# EAGLE board Ctrl_AVR_Reg_Rev30 (EAGLE 5.01)
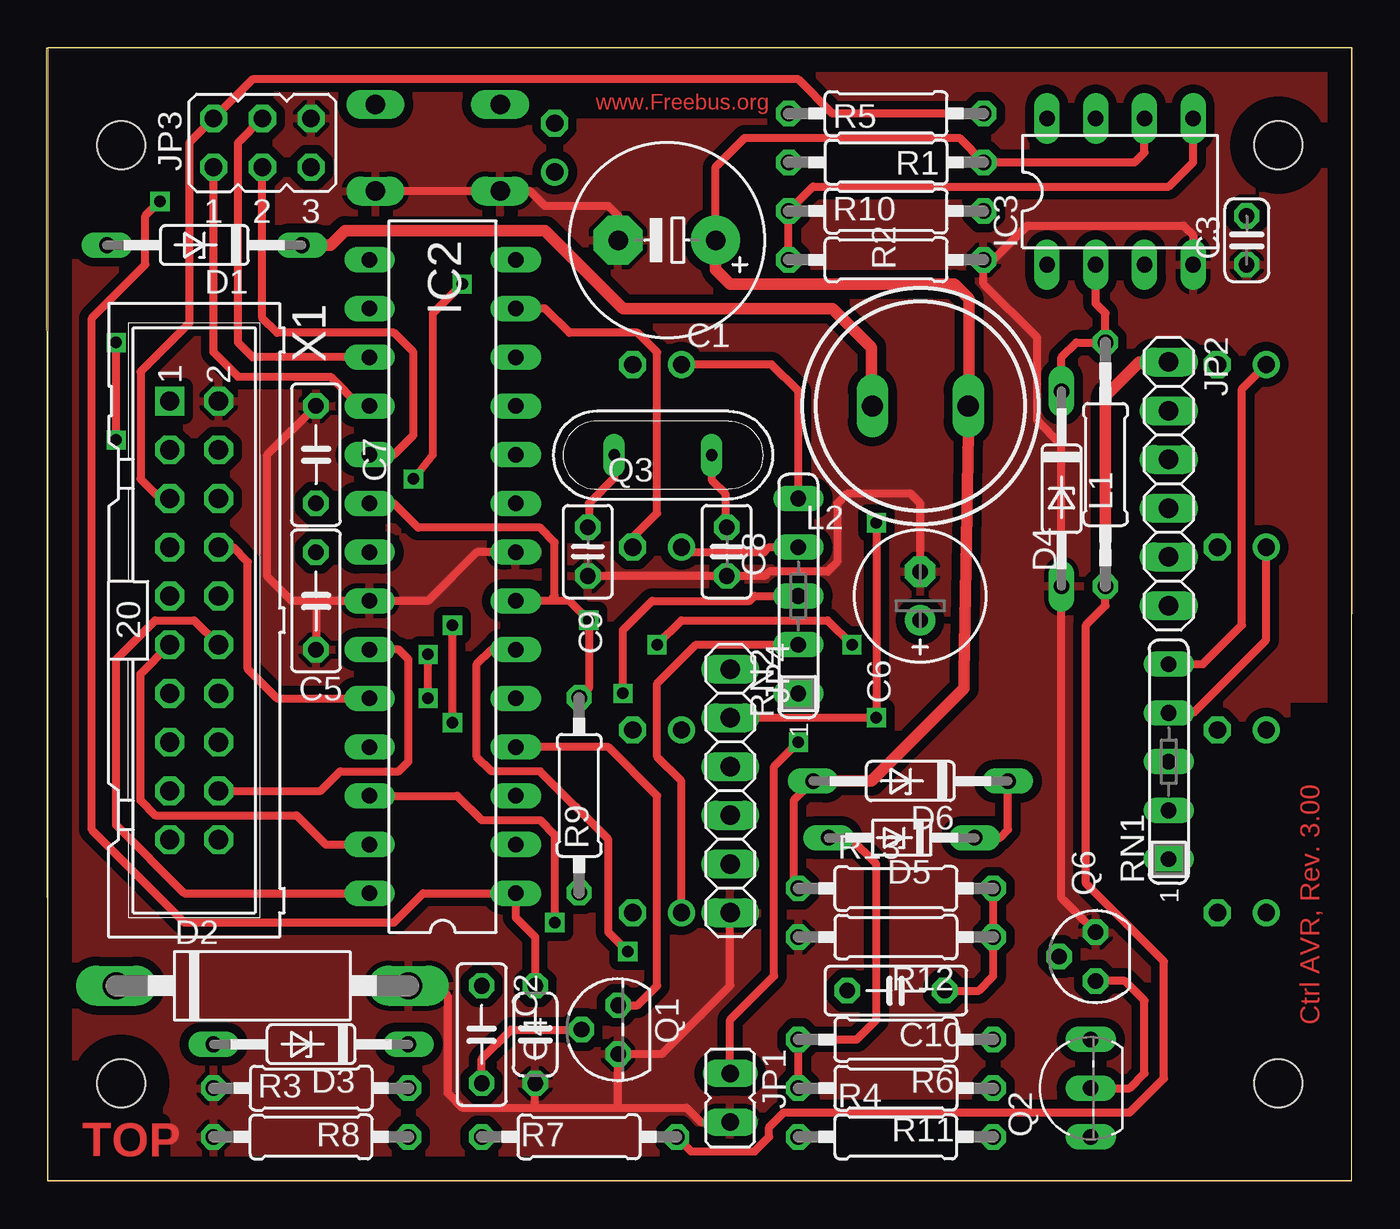
[diagram p0: board, top side]
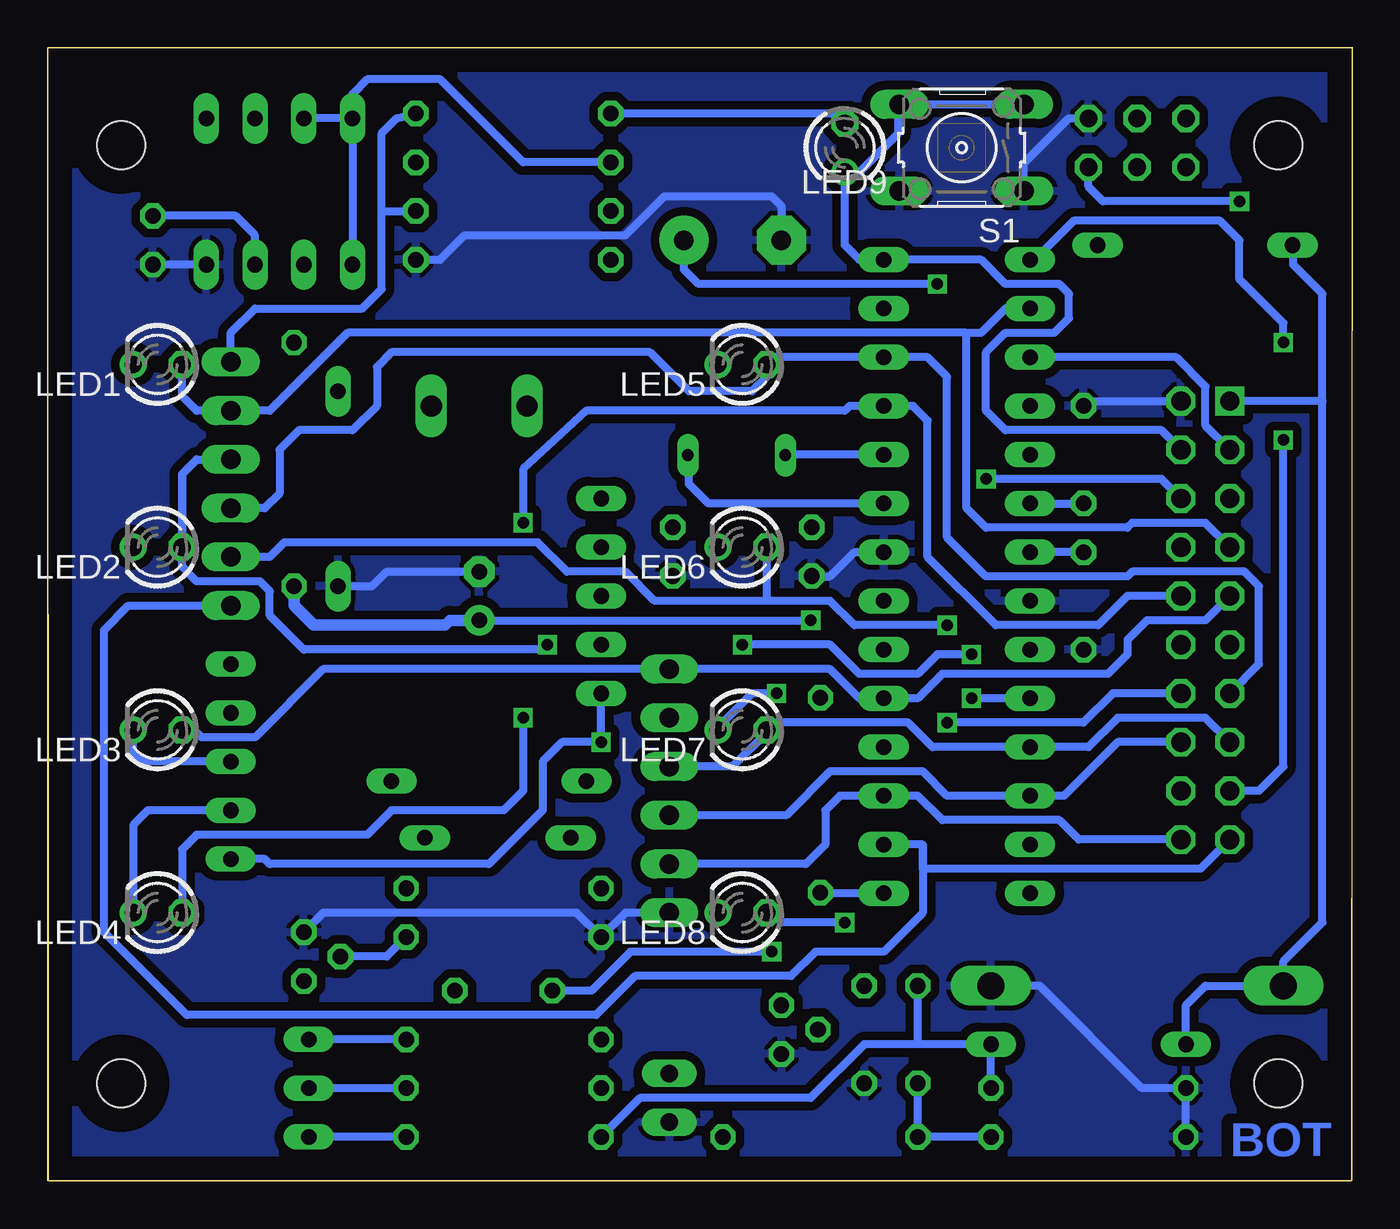
[diagram p1: board, bottom side, seen from below]

Size 67.94 x 59.04 mm. Coordinates in mm from the lower left corner, seen from the top.
Outline: 0,59.04 0,0 67.94,0 67.94,59.04 0,59.04
Copper layers (1*16): Top 0.035mm / dielectric 1.5mm / Bottom 0.035mm
Design rules "idefix-default *": minimum track width 10mil, minimum drill 24mil, track to track 18mil, track to pad 12mil, pad to pad 8mil, via to via 12mil, smd to smd 8mil, copper to edge 50mil, drill to drill 45mil, minimum pad ring 10mil, minimum via ring 8mil, stop-mask expansion 4mil, vias tented up to drill 0mil, thermal gap 10mil
Net classes: 0 default: width 0.406 mm; 1 supply: width 0.406 mm
Holes 2.5 mm at 3.81,53.97 64.13,5.08 64.13,53.97 3.81,5.08
tRestrict: area 64.8,7.4 to 66.8,24.9; area 27.4,55.4 to 37.8,56.6
Milling: 4 lines

## Footprints (pad centres in the part's own frame; a part is rotated, then mirrored left to right if it is on the bottom)
E5-10,5 = drill 1.016 pad 2.54 round: + -2.54,0 | drill 1.016 pad 2.54 octagon: - 2.54,0
C050-025X075 = drill 0.813 octagon: 1 -2.54,0; 2 2.54,0
C025-024X044 = drill 0.813 octagon: 1 -1.27,0; 2 1.27,0
C050-024X044 = drill 0.813 octagon: 1 -2.54,0; 2 2.54,0
E2,5-7 = drill 0.813 pad 1.6 round: + -1.27,0 | drill 0.813 pad 1.6 octagon: - 1.27,0
C025-025X050 = drill 0.813 octagon: 1 -1.27,0; 2 1.27,0
DO35Z10 = drill 0.813 long: A 5.08,0; C -5.08,0
C1702-15 = drill 1.397 long: A 7.62,0; C -7.62,0
DO34Z7 = drill 0.813 long: A 3.81,0; C -3.81,0
DIL28-3 = drill 0.813 long: 1 -16.51,-3.81; 2 -13.97,-3.81; 3 -11.43,-3.81; 4 -8.89,-3.81; 5 -6.35,-3.81; 6 -3.81,-3.81; 7 -1.27,-3.81; 8 1.27,-3.81; 9 3.81,-3.81; 10 6.35,-3.81; 11 8.89,-3.81; 12 11.43,-3.81; 13 13.97,-3.81; 14 16.51,-3.81; 15 16.51,3.81; 16 13.97,3.81; 17 11.43,3.81; 18 8.89,3.81; 19 6.35,3.81; 20 3.81,3.81; 21 1.27,3.81; 22 -1.27,3.81; 23 -3.81,3.81; 24 -6.35,3.81; 25 -8.89,3.81; 26 -11.43,3.81; 27 -13.97,3.81; 28 -16.51,3.81
DIL08 = drill 0.813 long: 1 -3.81,-3.81; 2 -1.27,-3.81; 3 1.27,-3.81; 4 3.81,-3.81; 5 3.81,3.81; 6 1.27,3.81; 7 -1.27,3.81; 8 -3.81,3.81
JP1 = drill 0.914 long: 1 0,-1.27; 2 0,1.27
1X06 = drill 1.016 long: 1 -6.35,0; 2 -3.81,0; 3 -1.27,0; 4 1.27,0; 5 3.81,0; 6 6.35,0
JP3Q = drill 0.914 octagon: 1 -2.54,-1.27; 2 -2.54,1.27; 3 0,-1.27; 4 0,1.27; 5 2.54,-1.27; 6 2.54,1.27
0207/12 = drill 0.813 octagon: 1 -6.35,0; 2 6.35,0
SD12_1000 = drill 1.1 long: 1 -2.5,0; 2 2.5,0
LED3MM = drill 0.9 octagon: A -1.27,0 | drill 0.9 round: K 1.27,0
TO92 = drill 0.813 octagon: 1 1.27,0; 2 0,1.905; 3 -1.27,0
TO92-BCE = drill 0.813 long: B 2.54,0; C 0,0; E -2.54,0
QS = drill 0.61 long: 1 -2.54,0; 2 2.54,0
SOT54E = drill 0.813 octagon: D -1.27,0; G 0,1.905; S 1.27,0
0207/10 = drill 0.813 octagon: 1 -5.08,0; 2 5.08,0
SIL5 = drill 0.813 long: 1 -5.08,0; 2 -2.54,0; 3 0,0; 4 2.54,0; 5 5.08,0
B3F-10XX = drill 1.016 long: 1 -3.251,2.261; 2 3.251,2.261; 3 -3.251,-2.261; 4 3.251,-2.261
ML20 = drill 1 square: 1 -11.43,-1.27 | drill 1 octagon: 2 -11.43,1.27; 3 -8.89,-1.27; 4 -8.89,1.27; 5 -6.35,-1.27; 6 -6.35,1.27; 7 -3.81,-1.27; 8 -3.81,1.27; 9 -1.27,-1.27; 10 -1.27,1.27; 11 1.27,-1.27; 12 1.27,1.27; 13 3.81,-1.27; 14 3.81,1.27; 15 6.35,-1.27; 16 6.35,1.27; 17 8.89,-1.27; 18 8.89,1.27; 19 11.43,-1.27; 20 11.43,1.27

## Placement (x,y rotation side)
C1  100u, 63V  [E5-10,5]  32.26,49.02 180 top
C2  100n  [C050-025X075]  22.6,7.62 270 top
C3  470p  [C025-024X044]  62.48,49.02 270 top
C4  100n  [C050-024X044]  25.4,7.62 90 top
C5  100n  [C050-025X075]  13.97,30.22 270 top
C6  100u, 16V  [E2,5-7]  45.46,30.48 90 top
C7  100n  [C050-025X075]  13.97,37.84 270 top
C8  33p  [C025-025X050]  35.38,32.79 90 top
C9  33p  [C025-025X050]  28.14,32.79 90 top
C10  100n  [C050-025X075]  44.19,9.9 180 top
D1  BAT46  [DO35Z10]  8.15,48.77 180 top
D2  P6KE39CA  [C1702-15]  11.17,10.16 0 top
D3  BAT46  [DO35Z10]  13.71,7.11 180 top
D4  BAT46  [DO35Z10]  52.83,36.06 270 top
D5  8v2  [DO34Z7]  44.5,17.88 180 top
D6  BAT46  [DO35Z10]  44.96,20.82 180 top
IC2  MEGA8-P  [DIL28-3]  20.57,31.49 90 top
IC3  MC34063AP  [DIL08]  55.88,51.56 0 top
JP1  [JP1]  35.56,4.31 180 top
JP2  [1X06]  58.42,36.32 270 top
JP3  [JP3Q]  11.17,54.1 0 top
JP4  [1X06]  35.56,20.32 270 top
L1  220u  [0207/12]  55.12,37.34 270 top
L2  150mH  [SD12_1000]  45.46,40.38 180 top
LED1  [LED3MM]  62.23,42.54 180 bottom
LED2  [LED3MM]  62.23,33.02 180 bottom
LED3  [LED3MM]  62.23,23.49 180 bottom
LED4  [LED3MM]  62.23,13.97 180 bottom
LED5  [LED3MM]  31.75,42.54 180 bottom
LED6  [LED3MM]  31.75,33.02 180 bottom
LED7  [LED3MM]  31.75,23.49 180 bottom
LED8  [LED3MM]  31.75,13.97 180 bottom
LED9  [LED3MM]  26.41,53.84 270 bottom
Q1  BC557  [TO92]  29.72,7.87 90 top
Q2  BC640  [TO92-BCE]  54.35,4.82 90 top
Q3  8,000  [QS]  32.05,37.82 0 top
Q6  BS170  [SOT54E]  54.61,11.68 90 top
R1  3R3  [0207/10]  43.69,53.08 180 top
R2  2k2  [0207/10]  43.69,48 0 top
R3  100k  [0207/10]  13.71,4.82 180 top
R4  12R  [0207/10]  44.19,2.28 0 top
R5  1k  [0207/10]  43.69,55.62 0 top
R6  100R  [0207/10]  44.19,7.36 180 top
R7  82k  [0207/10]  27.68,2.28 180 top
R8  47k  [0207/10]  13.71,2.28 0 top
R9  4k7  [0207/10]  27.68,20.09 270 top
R10  3k3  [0207/10]  43.69,50.54 0 top
R11  5k6  [0207/10]  44.19,4.82 180 top
R12  12k  [0207/10]  44.19,12.7 180 top
R13  220k  [0207/10]  44.19,15.24 0 top
RN1  1K  [SIL5]  58.42,21.84 90 top
RN2  1K  [SIL5]  39.11,30.48 90 top
S1  [B3F-10XX]  20.32,53.84 180 bottom
X1  FB_KOMPAKT  [ML20]  7.62,29.21 270 top

## Library data of the parts
C1-C10 L1 R1-R13 = rcl
D1-D6 = diode
IC2 = atmel
IC3 = mc34063
JP1 JP3 = jumper
JP2 JP4 = pinhead
L2 = inductor-neosid
LED1-LED9 = led
Q1 Q2 = transistor-pnp
Q3 = special
Q6 = transistor-small-signal
RN1 RN2 = resistor-sil
S1 = switch-omron
X1 = EIB_Freebus

## Nets
ADC4/SDA: IC2.27 X1.11
ADC5/SCL: IC2.28 X1.12
CTRL/MOSI: IC2.17 JP3.4 X1.3
EIB+: D1.A D2.C D3.A X1.1
EIB_IN: IC2.4 Q1.1
EIB_OUT: C10.2 IC2.6
GND: C1.- C3.2 C4.1 C5.2 C6.- C7.1 C8.1 C9.1 D2.A D4.A IC2.8 IC2.22 IC3.4 JP1.2 JP3.6 JP4.6 Q1.3 Q6.S R2.2 R3.2 R8.1 R12.2 S1.1 S1.2 X1.2
IO1: IC2.16 JP2.2 LED1.A X1.7
IO2: IC2.24 JP2.3 LED2.A X1.8
IO3: IC2.5 JP4.1 LED3.A X1.9
IO4: IC2.11 JP4.2 LED4.A X1.10
IO5: IC2.12 JP2.4 LED5.A X1.13
IO6: IC2.13 JP2.5 LED6.A X1.14
IO7: IC2.25 JP4.3 LED7.A X1.15
IO8: IC2.26 JP4.4 LED8.A X1.16
N$1: Q2.E R4.2
N$2: D5.C D6.C
N$3: C10.1 Q6.G R12.1 R13.2
N$4: Q2.B R6.1
N$5: Q2.C Q6.D R11.1
N$6: D1.C L2.2
N$7 [supply]: C2.2 Q1.2 R7.2 R8.2
N$8: C8.2 IC2.9 Q3.2
N$9: C9.2 IC2.10 Q3.1
N$10: D5.A R6.2 R11.2
N$11: LED4.K RN1.2
N$12: IC3.1 IC3.7 IC3.8 R1.2
N$13: LED3.K RN1.3
N$14: LED2.K RN1.4
N$15: LED1.K RN1.5
N$16: LED8.K RN2.2
N$17: LED7.K RN2.3
N$18: LED6.K RN2.4
N$19: LED9.A R5.1
N$20: D4.C IC3.2 L1.1
N$21: C3.1 IC3.3
N$22: IC3.5 R2.1 R10.1
N$23: LED5.K RN2.5
N$24: C5.1 IC2.21
N$25: JP1.1 RN1.1 RN2.1
PB4/MISO: IC2.18 JP3.1
PROG: IC2.14 LED9.K S1.3 S1.4 X1.4
RES1: IC2.15 X1.17
RES2: IC2.23 X1.18
RES3/RXD: IC2.2 JP2.6 X1.19
RES4/TXD: IC2.3 JP4.5 X1.20
RESET: C4.2 IC2.1 JP3.5 R9.2
SCK: IC2.19 JP3.3
V+: C2.1 D3.C R3.1 R4.1
VCC: C6.+ C7.2 IC2.7 IC2.20 JP2.1 JP3.2 L1.2 R5.2 R7.1 R9.1 R10.2 X1.5
VDC [supply]: C1.+ D6.A IC3.6 L2.1 R1.1 R13.1 X1.6

## Tracks (layer width: path | path; a pad name or v marks a point on that pad's centre or on a via)
ADC4/SDA
  Top 0.406: IC2.27 14.48,17.52 12.95,19.05 5.59,19.05 4.82,19.81 4.82,26.41 X1.11
ADC5/SCL
  Top 0.406: IC2.28 7.11,14.98 3.55,18.54 3.55,27.18 5.59,29.21 7.62,29.21 X1.12
CTRL/MOSI
  Top 0.406: JP3.4 9.9,54.1 9.9,43.69 10.67,42.92 IC2.17
  Bottom 0.406: X1.3 7.62,39.37 7.62,41.4 9.14,42.92 IC2.17
EIB+
  Bottom 0.406: 1.52,40.64 1.52,46.23 3.05,47.75 3.05,48.77 D1.A | 1.52,40.64 X1.1 | 1.52,40.64 1.52,13.46 3.55,11.43 D2.C 7.62,10.16 8.63,9.14 8.63,7.36 8.89,7.11 D3.A
EIB_IN
  Top 0.406: IC2.4 29.21,22.6 31.75,20.06 31.75,10.16 30.73,9.14 Q1.1
EIB_OUT  (via drill 0.6)
  Top 0.406: IC2.6 23.11,27.68 22.35,26.92 22.35,22.09 23.11,21.33 25.65,21.33 29.21,17.78 29.21,12.95 v30.22,11.94
  Bottom 0.406: v30.22,11.94 37.59,11.94 39.62,9.9 C10.2
GND
  Top 0.406: C9.1 28.17,31.52 28.19,31.49 28.22,31.52 C8.1 37.36,31.52 37.59,31.75 40.64,31.75 41.15,32.26 41.15,35.3 41.65,35.81 44.96,35.81 45.46,35.3 C6.- | 13.97,30.22 C5.2 | 13.97,30.22 IC2.22 19.81,30.22 22.35,32.76 IC2.8 | C7.1 11.43,37.84 11.43,31.49 12.7,30.22 13.97,30.22 | JP1.2 34.03,3.04 33.27,3.81 29.72,3.81 | 25.4,3.81 21.59,3.81 20.83,4.57 20.83,9.65 20.32,10.16 D2.A | 25.4,3.81 29.72,3.81 | 29.72,3.81 Q1.3 32,6.6 35.56,10.16 JP4.6 | 25.4,3.81 C4.1 | S1.1 17.25,51.58 17.27,51.56 17.3,51.58 S1.2 25.12,51.58 25.91,50.8 29.21,50.8 29.72,50.29 C1.- | IC3.4 59.43,47.75 59.69,48 59.69,49.27 59.18,49.78 51.05,49.78 49.27,48 R2.2 48.77,46.73 51.56,43.94 51.56,39.62 52.83,38.35 D4.A 52.83,14.73 Q6.S
  Bottom 0.406: IC3.4 C3.2 | R2.2 47.5,48 46.23,49.27 37.84,49.27 35.81,51.3 30.22,51.3 29.72,50.8 C1.- | IC2.8 25.91,32.76 27.18,31.49 27.94,31.49 27.96,31.52 C9.1 | C7.1 13.71,40.64 X1.2 | R8.1 R3.2 10.92,4.82 16.25,10.16 D2.A | JP4.6 37.84,13.97 R12.2 40.38,13.97 53.59,13.97 Q6.S | S1.1 17.07,53.03 14.73,55.37 JP3.6 | C6.- 50.29,31.75 51.05,30.98 D4.A
  pour Top: 0.51,58.42 0.51,0.25 67.56,0.25 67.56,58.42
  pour Bottom: 0.56,58.42 67.46,58.42 67.46,0.55 0.56,0.3
IO1
  Bottom 0.406: IC2.16 18.03,45.46 19.3,44.19 20.06,44.19 | 20.06,44.19 52.32,44.19 56.39,40.13 JP2.2 60.2,40.13 60.96,40.89 LED1.A | X1.7 7.62,34.29 11.43,34.29 11.68,34.03 19.05,34.03 20.06,35.05 20.06,44.19
IO2  (via drill 0.6)
  Top 0.406: IC2.24 11.94,25.14 10.41,26.67 10.41,32.26 9.65,33.02 X1.8 | v19.81,25.14 v19.81,27.43 | v31.75,27.94 33.02,29.21 40.64,29.21 v41.91,27.94
  Bottom 0.406: LED2.A 60.7,33.02 60.96,33.27 60.96,36.83 | JP2.3 60.2,37.59 60.96,36.83 | 60.96,36.83 60.96,32 60.2,31.24 56.89,31.24 56.39,30.73 56.39,29.46 54.61,27.68 42.16,27.68 v41.91,27.94 | IC2.24 v19.81,25.14 | v19.81,27.43 21.59,27.43 22.6,26.41 25.65,26.41 27.18,27.94 v31.75,27.94
IO3
  Bottom 0.406: X1.9 7.62,29.21 10.67,29.21 11.68,28.19 11.68,27.43 12.7,26.41 21.33,26.41 22.6,25.14 IC2.5 25.65,25.14 27.18,26.67 JP4.1 53.59,26.67 57.15,23.11 59.94,23.11 60.32,23.49 LED3.A
IO4  (via drill 0.6)
  Top 0.406: v43.18,34.29 v43.18,24.13 JP4.2
  Bottom 0.406: v43.18,34.29 43.18,37.08 39.88,40.13 26.41,40.13 26.16,40.38 IC2.11 22.86,40.38 22.1,39.62 22.1,32.51 18.54,28.95 13.21,28.95 11.68,30.48 X1.10 | LED4.A 60.96,17.27 60.2,18.03 51.31,18.03 50.04,19.3 44.19,19.3 43.18,20.32 v43.18,24.13
IO5
  Bottom 0.406: JP2.4 56.64,35.05 55.88,35.81 55.88,38.1 54.86,39.11 52.07,39.11 50.8,40.38 50.8,42.41 50.04,43.18 36.57,43.18 34.54,41.15 31.24,41.15 30.48,41.91 LED5.A 30.48,42.67 30.22,42.92 IC2.12 22.1,42.92 21.08,41.91 21.08,33.52 19.05,31.49 11.68,31.49 11.43,31.75 5.59,31.75 4.82,30.98 4.82,26.92 X1.13
IO6  (via drill 0.6)
  Top 0.406: LED6.A 30.48,33.52 31.75,34.8 31.75,43.18 30.73,44.19 27.18,44.19 25.91,45.46 IC2.13 | v21.08,23.87 v21.08,28.95
  Bottom 0.406: 30.48,30.22 36.32,30.22 37.84,31.75 40.89,31.75 42.42,33.27 55.62,33.27 56.39,32.51 JP2.5 | 30.48,30.22 LED6.A | X1.14 12.44,25.4 13.97,23.87 v21.08,23.87 | 30.48,30.22 27.18,30.22 25.91,28.95 v21.08,28.95
IO7
  Bottom 0.406: X1.15 7.62,24.13 12.19,24.13 13.71,22.6 IC2.25 21.84,22.6 23.11,23.87 29.97,23.87 30.48,23.36 | 30.48,23.36 LED7.A | 30.48,23.36 32.26,21.59 JP4.3
IO8  (via drill 0.6)
  Top 0.406: IC2.26 21.33,20.06 22.6,18.79 25.65,18.79 26.41,18.03 v26.41,13.46
  Bottom 0.406: X1.16 12.19,22.86 14.98,20.06 IC2.26 21.08,20.06 22.35,21.33 27.18,21.33 29.46,19.05 JP4.4 | LED8.A 30.22,13.97 29.72,13.46 v26.41,13.46
N$1
  Bottom 0.406: R4.2 Q2.E
N$2
  Top 0.406: D5.C 49.63,17.88 50.04,18.29 D6.C
N$3
  Top 0.406: R13.2 R12.1 49.27,10.66 48.51,9.9 C10.1
  Bottom 0.406: R12.1 50.29,11.68 Q6.G
N$4
  Bottom 0.406: R6.1 Q2.B
N$5
  Top 0.406: Q6.D 56.13,10.41 57.15,9.39 57.15,5.58 56.39,4.82 Q2.C
  Bottom 0.406: Q2.C 54.35,5.08 54.1,4.82 R11.1
N$6
  Top 0.61: D1.C 14.73,48.77 15.49,49.53 25.91,49.53 29.97,45.46 40.89,45.46 42.92,43.43 42.92,40.38 L2.2
N$7
  Top 0.406: C2.2 22.6,6.35 24.13,7.87 Q1.2
  Bottom 0.406: R8.2 R7.2 C2.2
N$8
  Top 0.406: Q3.2 34.59,36.52 35.3,35.81 35.3,34.03 35.33,34.06 C8.2
  Bottom 0.406: IC2.9 33.53,35.3 34.54,36.32 34.54,37.59 34.59,37.64 Q3.2
N$9
  Top 0.406: Q3.1 29.51,36.62 28.19,35.3 28.19,34.03 28.17,34.06 C9.2
  Bottom 0.406: Q3.1 29.49,37.82 29.46,37.84 IC2.10
N$10
  Top 0.406: R11.2 R6.2 42.16,7.36 43.18,8.38 43.18,16.51 41.81,17.88 D5.A
N$11
  Bottom 0.406: RN1.2 62.74,19.3 63.5,18.54 LED4.K
N$12
  Bottom 0.406: IC3.8 IC3.7 | IC3.8 IC3.1 | R1.2 43.18,53.08 47.5,57.4 51.31,57.4 52.07,56.64 52.07,55.88 52.32,55.62 IC3.8
N$13
  Bottom 0.406: RN1.3 62.99,21.84 63.5,22.35 LED3.K
N$14
  Top 0.406: LED2.K 63.5,28.19 59.69,24.38 RN1.4
N$15
  Top 0.406: LED1.K 62.23,41.27 62.23,28.95 60.2,26.92 RN1.5
N$16
  Top 0.406: LED8.K 33.02,20.82 31.75,22.09 31.75,25.91 33.78,27.94 RN2.2
N$17  (via drill 0.6)
  Top 0.406: RN2.3 36.83,30.48 36.57,30.22 31.49,30.22 29.97,28.7 v29.97,25.4
  Bottom 0.406: LED7.K 33.02,23.62 31.24,25.4 v29.97,25.4
N$18
  Top 0.406: RN2.4 37.59,33.02 37.34,32.76 33.27,32.76 LED6.K
N$19
  Bottom 0.406: R5.1 26.92,55.62 LED9.A
N$20
  Top 0.406: D4.C 52.83,42.92 53.59,43.69 L1.1 55.12,45.21 54.61,45.72 IC3.2
N$21
  Bottom 0.406: IC3.3 57.15,49.27 58.16,50.29 C3.1
N$22
  Top 0.406: R2.1 R10.1 39.88,51.81 58.42,51.81 59.69,53.08 IC3.5
N$23
  Top 0.406: LED5.K 37.72,42.54 39.11,41.15 RN2.5
N$24
  Bottom 0.406: 13.71,32.76 C5.1 IC2.21
N$25  (via drill 0.6)
  Top 0.406: JP1.1 35.56,8.38 37.84,10.66 37.84,21.59 v39.11,22.86
  Bottom 0.406: v39.11,22.86 RN2.1 | v39.11,22.86 38.86,22.86 | v39.11,22.86 41.15,22.86 42.16,21.84 42.16,19.3 44.96,16.51 56.39,16.51 56.64,16.76 RN1.1
PB4/MISO
  Top 0.406: IC2.18 16.25,40.38 14.73,41.91 9.9,41.91 8.63,43.18 JP3.1
PROG
  Bottom 0.406: S1.4 S1.3 | S1.4 23.6,56.11 23.62,56.13 | S1.4 23.57,55.93 23.62,55.88 23.62,54.61 25.65,52.58 LED9.K 26.41,48.77 25.65,48 IC2.14 19.3,48 18.03,46.73 15.24,46.73 14.73,46.23 14.73,44.95 15.49,44.19 18.03,44.19 19.05,43.18 19.05,40.13 18.03,39.11 9.9,39.11 X1.4
RES1  (via drill 0.6)
  Top 0.406: v3.55,38.6 v3.55,43.69
  Bottom 0.406: IC2.15 16.51,48 14.48,50.03 6.86,50.03 5.84,49.02 5.84,46.99 3.55,44.7 v3.55,43.69 | X1.17 4.82,20.32 3.55,21.59 v3.55,38.6
RES2
  Top 0.406: X1.18 14.22,20.32 15.24,21.33 18.29,21.33 18.79,21.84 18.79,27.18 18.29,27.68 IC2.23
RES3/RXD
  Bottom 0.406: X1.19 7.87,16.25 22.35,16.25 22.35,17.52 | 22.35,17.52 IC2.2 | 22.35,17.52 22.35,13.97 24.38,11.94 27.94,11.94 29.21,10.66 37.34,10.66 39.37,8.63 60.7,8.63 65.02,12.95 65.02,28.7 63.75,29.97 JP2.6
RES4/TXD
  Bottom 0.406: X1.20 14.22,17.78 15.24,18.79 21.33,18.79 22.6,20.06 IC2.3 26.67,20.06 27.43,19.3 27.43,17.52 28.45,16.51 JP4.5
RESET  (via drill 0.6)
  Top 0.406: C4.2 25.4,12.7 24.38,13.71 IC2.1 19.56,14.98 18.03,13.46 7.11,13.46 2.28,18.29 2.28,44.95 5.08,47.75 5.08,50.29 v5.84,51.05
  Bottom 0.406: R9.2 27.68,14.98 IC2.1 | v5.84,51.05 12.95,51.05 13.71,51.81 JP3.5
SCK
  Top 0.406: JP3.3 11.17,44.95 11.94,44.19 18.03,44.19 19.05,43.18 19.05,38.86 18.03,37.84 IC2.19
V+
  Bottom 0.406: R3.1 D3.C 22.6,7.11 | R4.1 37.08,4.31 28.19,4.31 25.4,7.11 22.6,7.11 | 22.6,7.11 C2.1
VCC  (via drill 0.6)
  Top 0.406: 26.16,30.22 IC2.7 | 27.68,25.14 R9.1 28.19,25.68 v28.19,29.21 27.18,30.22 26.16,30.22 | IC2.20 18.03,35.3 19.3,34.03 25.65,34.03 26.41,33.27 26.41,30.48 26.16,30.22 | R7.1 33.53,1.52 36.83,1.52 37.59,2.28 37.59,2.79 38.35,3.55 56.39,3.55 58.16,5.33 58.16,11.43 54.1,15.49 54.1,28.95 55.12,29.97 L1.2 | X1.5 5.84,35.56 4.82,36.57 4.82,42.16 7.36,44.7 7.36,54.1 JP3.2 10.67,57.4 39.11,57.4 40.89,55.62 R5.2 49.02,55.62
  Top 0.61: JP2.1 56.89,42.67 55.12,40.89 L1.2
  Bottom 0.406: JP2.1 58.42,44.19 57.15,45.46 51.56,45.46 50.54,46.48 50.54,50.54 | R10.2 48.77,50.8 49.02,50.54 50.54,50.54 | IC2.20 C7.2 | 50.54,50.54 50.54,54.61 49.78,55.37 R5.2 | C6.+ v28.19,29.21
  Bottom 0.61: L1.2 55.12,29.97 54.1,28.95 47.24,28.95 46.99,29.21 C6.+
VDC  (via drill 0.6)
  Top 0.406: C1.+ 34.8,52.83 36.32,54.35 47.5,54.35 R1.1 56.64,53.08 57.15,53.59 IC3.6 | R13.1 38.86,15.49 38.86,19.81 D6.A | v19.05,36.57 20.06,37.84 20.06,45.21 v21.59,46.73
  Top 0.61: 48,40.38 48,45.97 47.24,46.73 35.56,46.73 34.8,47.49 C1.+ | D6.A 42.92,20.82 47.75,25.65 47.75,26.41 48,40.38 | 48,40.38 L2.1
  Bottom 0.406: X1.6 9.9,36.57 v19.05,36.57 | v21.59,46.73 34.03,46.73 34.8,47.49 C1.+

## Text on the board
Top: www.Freebus.org | Ctrl AVR, Rev. 3.00 | TOP
Bottom: BOT
Case: Freebus | Binäreingang, 8x230 V